# Altium PCB PCB2.PcbDoc
Units mil, origin at the board's own origin, x right, y up, seen from the top; angles counter-clockwise.
Board outline 3940.03 x 2530.03 mil, 2 copper layers (Top Layer, Bottom Layer); 24 components, 29 nets, 108 pads, 24 vias.
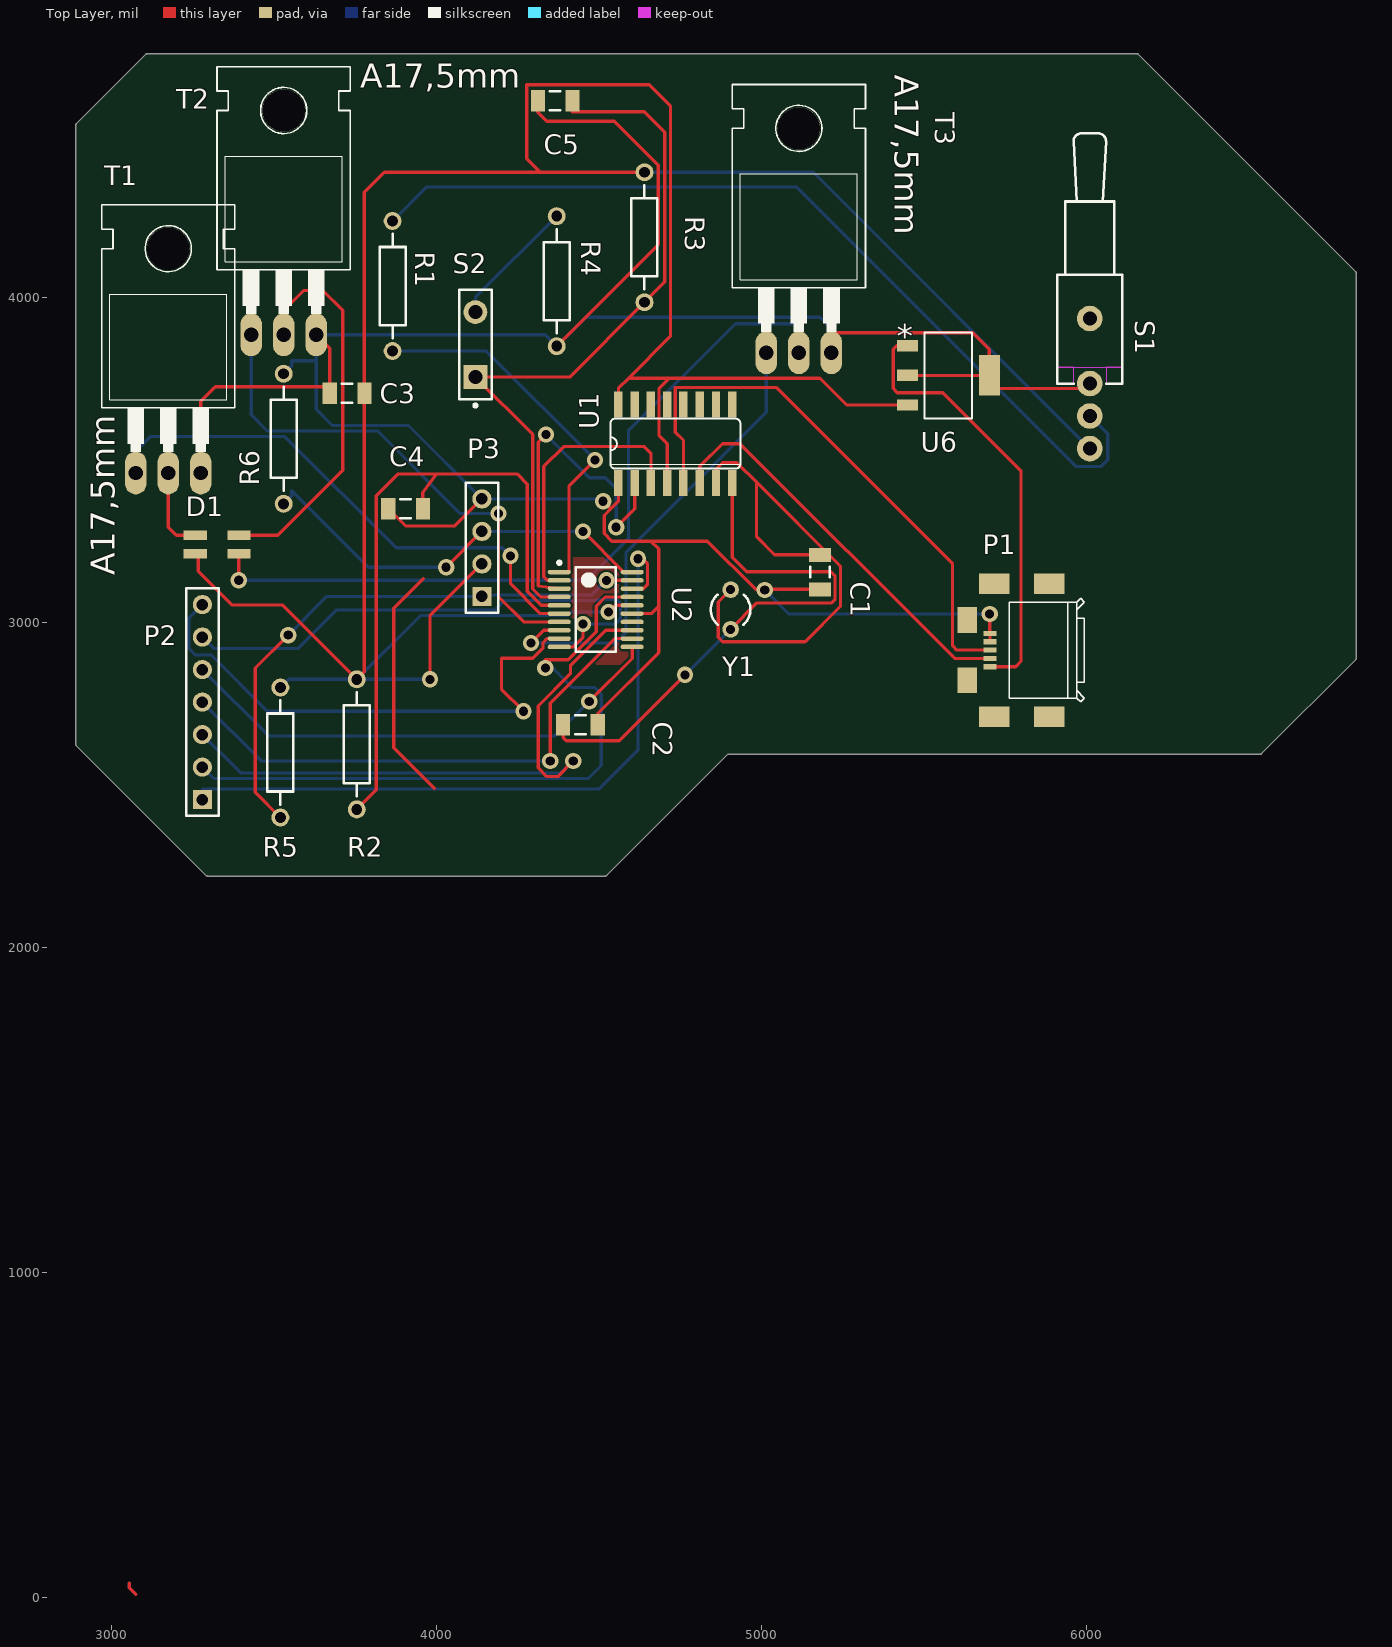
[diagram p0: Top Layer view]
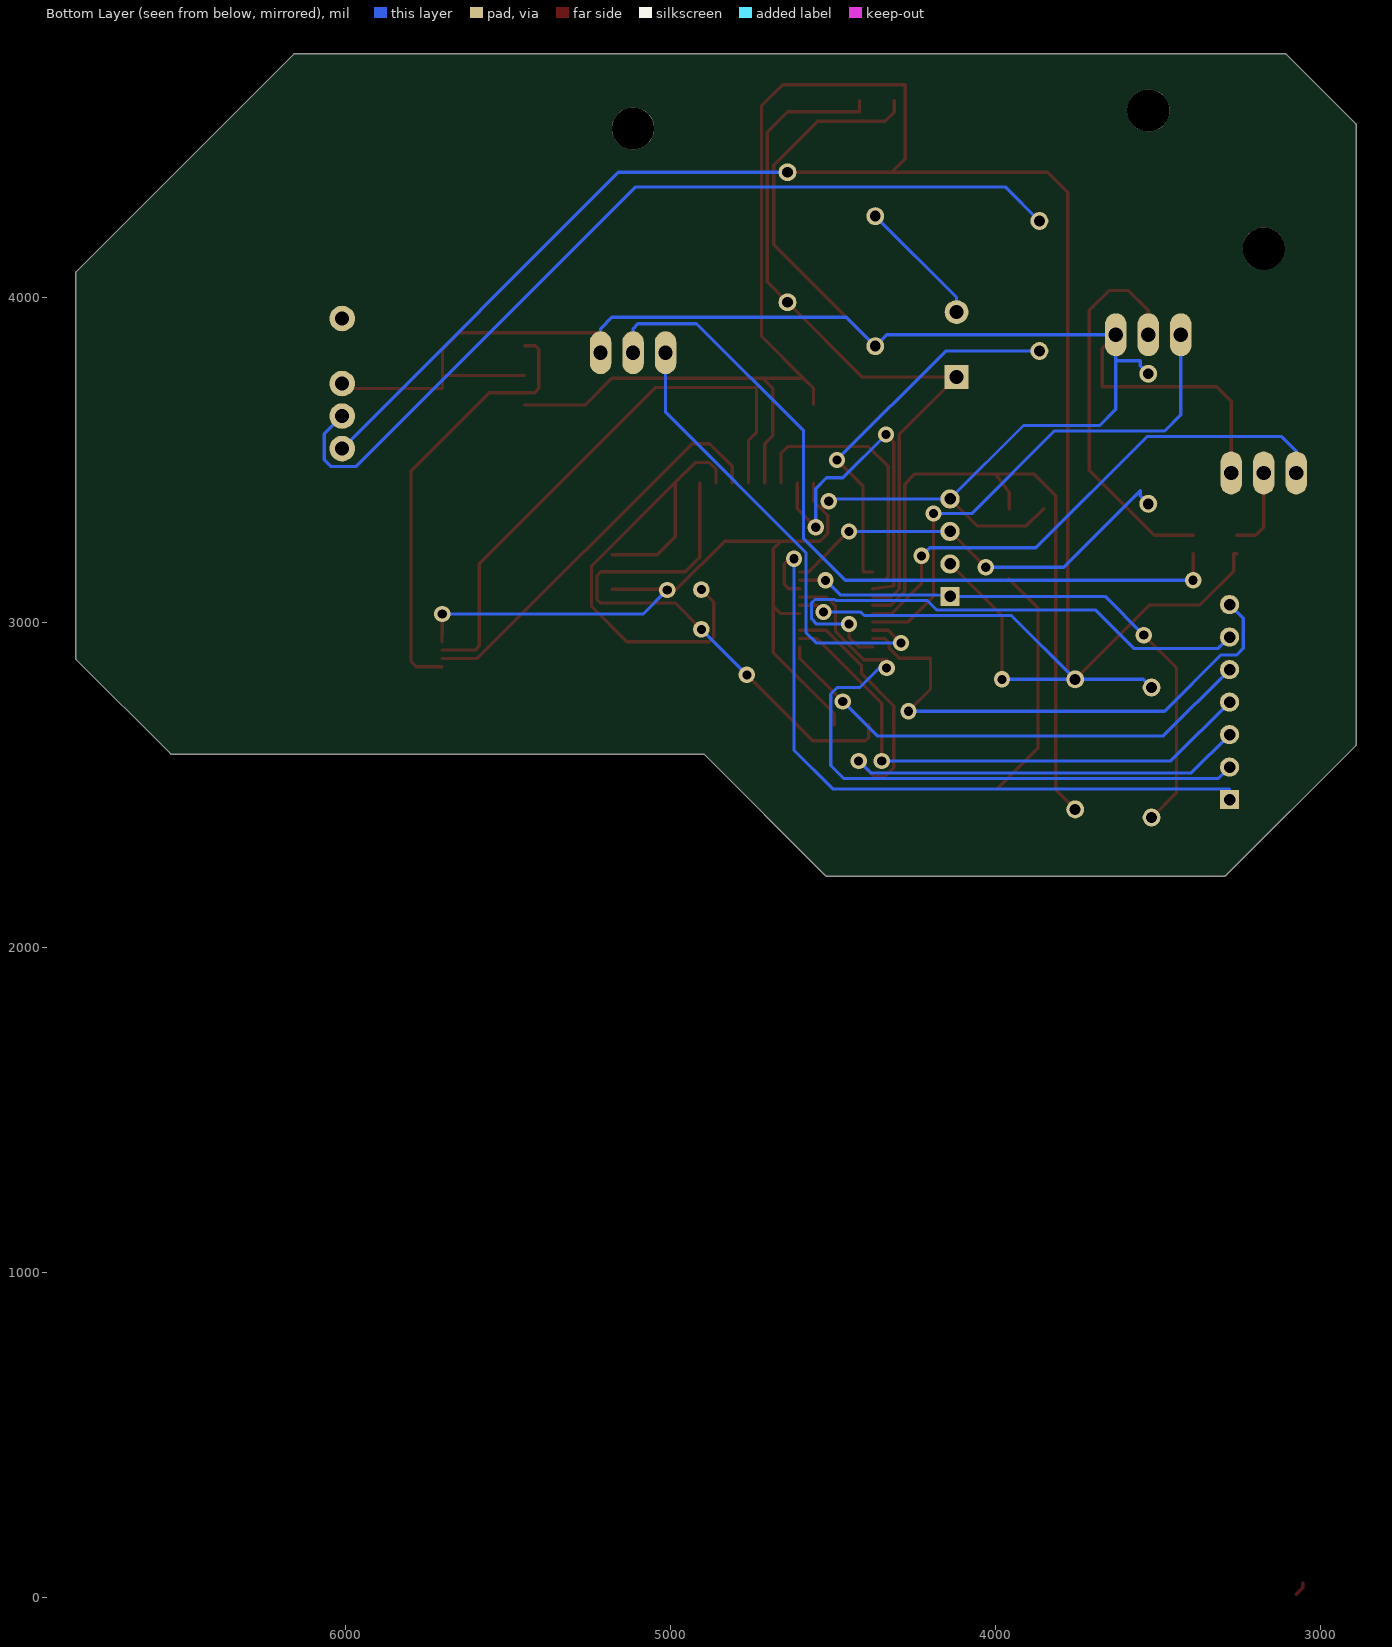
[diagram p1: Bottom Layer view, seen from below]

## Layer stack, top to bottom
Top Solder: solder mask 0.4, Solder Resist, Dk 3.5
Top Layer: signal copper 1.4
Dielectric 1: dielectric 12.6, FR-4, Dk 4.8
Bottom Layer: signal copper 1.4
Bottom Solder: solder mask 0.4, Solder Resist, Dk 3.5

## Board outline
2891.45,2621.45 3291.45,2221.45 3291.44,2221.47 ccw(c3295,2225) 3295,2219.99 4520,2219.99 ccw(c4520,2225) 4523.56,2221.47 4523.55,2221.45 4897.08,2594.99 6535,2594.99 ccw(c6535,2600) 6538.56,2596.47 6538.55,2596.45 6828.55,2886.45 6828.53,2886.44 ccw(c6825,2890) 6830.02,2890 6830.02,4075 ccw(c6825,4075) 6828.53,4078.56 6828.55,4078.55 6158.55,4748.55 6158.56,4748.53 ccw(c6155,4745) 6155,4750.02 3110,4750.02 ccw(c3110,4745) 3106.44,4748.53 3106.45,4748.55 2891.45,4533.55 2891.47,4533.56 ccw(c2895,4530) 2889.99,4530 2889.99,2625 ccw(c2895,2625)

## Design rules (kind name [scope] priority, off if disabled: settings)
Clearance [All] p1: gap=7 ignorepadtopadclearanceinfootprint=FALSE
PolygonConnect [All] p1: connectstyle=Relief reliefconductorwidth=10 reliefentries=4 polygonreliefangle="90 Angle" airgapwidth=10
RoutingVias [All] p1: holewidth=28 width=50 viastyle="Through Hole" minholewidth=28 minwidth=50 maxholewidth=28 maxwidth=50
SolderMaskExpansion [All] p1: expansion=4
Width [All] p1: maxlimit=10 minlimit=10 preferedwidth=10
30 further rules are at their usual default settings.

## Components (designator, comment, footprint, x,y, rotation, side; value= is the part's Value field where it differs from the comment)
C1 "Cap Semi" C1206 5180,3155 r90 top value=22pF
C2 "Cap Semi" C1206 4443.15,2685 r180 top value=22pF
C3 "Cap Semi" C1206 3725,3705 r0 top value=100pF
C4 "Cap Semi" C1206 3905,3350 r0 top value=100pF
C5 "Cap Semi" C1206 4365,4605 r0 top value=100pF
D1 "smd3528" PLCC4 3325,3240 r0 top
P1 "ZX62M-B-5P(01)" HRS_ZX62M-B-5P(01) 5835,2915 r90 top
P2 "Header 7" HDR1X7 3280,2455 r90 top
P3 "Header 4" HDR1X4 4140,3080 r90 top
R1 "Res2" AXIAL-0.4 3865,4035 r90 top value=1K
R2 "Res2" AXIAL-0.4 3755,2625 r90 top value=1K
R3 "Res2" AXIAL-0.4 4640,4185 r90 top value=10K
R4 "Res2" AXIAL-0.4 4370,4050 r90 top value=100
R5 "Res2" AXIAL-0.4 3520,2600 r90 top value=10K
R6 "Res2" AXIAL-0.4 3530,3565 r90 top value=10K
S1 "SW-SPDT" TL36WW15050 6010,3735 r90 top
S2 "SW-PB" SPST-2 4120,3855 r90 top
T1 "IRF530" TO220 3175,3710 r0 top
T2 "IRF530" TO220 3530,4135 r0 top
T3 "IRF530" TO220 5115,4080 r0 top
U1 "CH340" SO16 4735,3550 r0 top
U2 "STM32F030F4P6" STM-TSSOP20_N 4490,3040 r0 top
U6 "LM2937IMP-12" SOT230P700X180-4N 5575,3760 r0 top
Y1 "12MHZ" R38 4905,3040 r0 top

## Footprints (in the part's own frame and the unit in brackets; to place one, negate y for a bottom-side part, rotate by r counter-clockwise, add the part's x,y. Pads: shape width x height; smd on the part's side, far side on the other; paste and mask are expansions set on the pad)
AXIAL-0.4 [mm] "Axial Device, Thru-Hole; 2 Leads; 0.4 in Pin Spacing"
  round 1.4 hole 0.85: 1(-5.08,0) 2(5.08,0)
  silkscreen extent -4.06,-1.02 4.06,1.02
C1206 [mm] "Chip Capacitor, Body 3.2x1.6mm, IPC High Density"
  rect 1.1x1.7 smd: 1(-1.35,0) 2(1.35,0)
  silkscreen extent -0.4,-0.75 0.4,0.75, body extent -1.7,-0.9 1.7,0.9, height 1.3
HDR1X4 [mm] "Connector; Header; 4 Position"
  rect 1.5x1.5 hole 0.9: 1(0,0)
  round 1.5 hole 0.9: 2(2.54,0) 3(5.08,0) 4(7.62,0)
  silkscreen extent -1.27,-1.27 8.89,1.27
HDR1X7 [mm] "Connector; Header; 7 Position"
  rect 1.5x1.5 hole 0.9: 1(0,0)
  round 1.5 hole 0.9: 2(2.54,0) 3(5.08,0) 4(7.62,0) 5(10.16,0) 6(12.7,0) 7(15.24,0)
  silkscreen extent -1.27,-1.27 16.51,1.27
HRS_ZX62M-B-5P(01) [mm]
  rect 0.4x1.05 smd: 1(-1.3,3.355) 2(-0.65,3.355) 3(0,3.355) 4(0.65,3.355) 5(1.3,3.355)
  rect 1.6x2.4 smd: S1(5.2,-1.27) S2(-5.2,-1.27) S3(-5.2,3.03) S6(5.2,3.03)
  rect 2x1.5 smd: S4(-2.35,5.13) S5(2.35,5.13)
  silkscreen extent -4.05,-4.02 4.05,1.83
PLCC4 [mm]
  rect 1.8x0.75 smd: 1(1.7,-0.725) 2(-1.7,-0.725) 3(-1.7,0.725) 4(1.7,0.725)
R38 [mm] "Crystal, Thru-Hole; 2 Leads; Body 3.1 x 8.2 mm (Dia.xH)"
  round 1.3 hole 0.7: 1(0,1.55) 2(0,-1.55)
  silkscreen extent -1.55,-1.19 1.55,1.17
SO16 [mil]
  rect 26x80 smd: 1(-175,-121) 2(-125,-121) 3(-75,-121) 4(-25,-121) 5(25,-121) 6(75,-121) 7(125,-121) 8(175,-121) 9(175,121) 10(125,121) 11(75,121) 12(25,121) 13(-25,121) 14(-75,121) 15(-125,121) 16(-175,121)
  silkscreen extent -200,-77 200,77
SOT230P700X180-4N [mil]
  rect 64x35 smd: 1(-126,91) 2(-126,0) 3(-126,-91)
  rect 64x125 smd: 4(126,0)
  silkscreen extent -73,-132 73,132
SPST-2 [mm] "Switch; 2 Leads"
  rect 1.85x1.85 hole 1.1: 1(-2.54,0)
  round 1.85 hole 1.1: 2(2.54,0)
  silkscreen extent -4.89,-1.27 4.28,1.27
STM-TSSOP20_N [mm] "SOP, 20-Leads, Body 6.6x4.5mm, Pitch 0.65mm, IPC Medium Density"
  oval 1.8x0.35 smd: 1(-2.85,2.925) 2(-2.85,2.275) 3(-2.85,1.625) 4(-2.85,0.975) 5(-2.85,0.325) 6(-2.85,-0.325) 7(-2.85,-0.975) 8(-2.85,-1.625) 9(-2.85,-2.275) 10(-2.85,-2.925) 11(2.85,-2.925) 12(2.85,-2.275) 13(2.85,-1.625) 14(2.85,-0.975) 15(2.85,-0.325) 16(2.85,0.325) 17(2.85,0.975) 18(2.85,1.625) 19(2.85,2.275) 20(2.85,2.925)
  silkscreen extent -2.97,-3.3 1.55,3.77, body extent -2.25,-3.3 2.25,3.3, height 1.2
TL36WW15050 [mm] "Switch; 4 Leads"
  round 2 hole 1.1: 1(0,0) 2(-2.54,0) 3(-5.08,0) M(5.08,0)
  Top Layer keep-out region: 0,-1.27 0,-2.54 1.27,-2.54 1.27,-1.27
  Top Layer keep-out region: 0,2.54 0,1.27 1.27,1.27 1.27,2.54
  Top Layer keep-out region: 1.27,2.54 1.27,-2.54 8.509,-2.54 8.509,2.54
  silkscreen extent 0,-2.54 19.56,2.54
TO220 [mil]
  oval 66x132 hole 44: 1(-100,-250) 2(0,-250) 3(100,-250)
  round 130 hole 130 unplated: None(0,440)
  silkscreen extent -205,-185 205,575

## Part data
C1 C2 C3 C4 C5: "Capacitor (Semiconductor SIM Model)", LatestRevisionDate=29-May-2009, LatestRevisionNote="IPC-7351 Footprint Added.", PackageDescription="Chip Capacitor", PackageReference=C1206, Published=8-Jun-2000, Publisher="Altium Limited"
D1: library part 67-23SDRSUGSUBC/TR8, "SMD-LED RGB 112/216/57mcd PLCC", Package=None, Availability=Warning, MF=Everlight, MP=67-23SDRSUGSUBC/TR8, Price=None
P1: "Conn Micro USB 2.0 Type B RCP 5 POS 0.65mm Solder RA SMD 5 Terminal 1 Port T/R", Package=None, Availability=Unavailable, MF=Hirose, MP=ZX62M-B-5P(01), Price=None
P2: "Header, 7-Pin", LatestRevisionDate=17-Jul-2002, LatestRevisionNote="Re-released for DXP Platform.", Publisher="Altium Limited"
P3: "Header, 4-Pin", LatestRevisionDate=17-Jul-2002, LatestRevisionNote="Re-released for DXP Platform.", Publisher="Altium Limited"
R1 R2 R3 R4 R5 R6: "Resistor", LatestRevisionDate=17-Jul-2002, LatestRevisionNote="Re-released for DXP Platform.", PackageDescription="Axial Device, Thru-Hole; 2 Leads; 0.4 in Pin Spacing", PackageReference=AXIAL-0.4, Published=8-Jun-2000, Publisher="Altium Limited"
S1: "SPDT Subminiature Toggle Switch, Right Angle Mounting, Vertical Actuation", ComponentLink1Description="Manufacturer Link", ComponentLink1URL=http://www.apem.com, DatasheetVersion=05-Dec-2000, LatestRevisionDate=17-Dec-2003, LatestRevisionNote="Schematic revised, PCB Footprint replaced.", PackageDescription="Switch; 4 Leads", PackageReference=TL36WW15050, Published=24-Mar-1999, Publisher="Altium Limited"
S2: "Switch", LatestRevisionDate=17-Jul-2002, LatestRevisionNote="Re-released for DXP Platform.", PackageDescription="Switch; 2 Leads", PackageReference=SPST-2, Published=24-Mar-1999, Publisher="Altium Limited"
T1 T2 T3: library part IRF840, "Trans MOSFET N-CH 500V 8A 3-Pin(3+Tab) TO-220AB", Package="TO-220 Vishay", Availability=Bad, MF=Vishay, MP=IRF840, Price="3.90 USD"
U1: "Eaton / Cutler Hammer CH340 Circuit Breaker 40 Amp 240 Volt AC 3-Pole Plug-On Mount", Package=None, Availability=Bad, MF="Eaton / Cutler Hammer", MP=CH340, Price="248.29 USD"
U2: "ARM Cortex-M0 32-bit MCU, 16 KB Flash, 4 KB Internal RAM, 15 I/Os, 20-pin TSSOP, -40 to 85 degC, Tube", I/Os (High Current)=15, Operating Frequency(F) (Processor speed) (MHz)=48, Supplier Part Number 1=497-14044-5-ND, Supply Voltage(Vcc) min (V)=2.4, ComponentLink1Description="Manufacturer URL", ComponentLink1URL=http://www.st.com/web/en/home.html, ComponentLink2Description=Datasheet, ComponentLink2URL=http://www.st.com/st-web-ui/static/active/en/resource/technical/document/datasheet/DM00088500.pdf, ComponentLink3Description="Package Specification", ComponentLink3URL=http://www.st.com/st-web-ui/static/active/en/resource/technical/document/datasheet/DM00065136.pdf, Core="ARM Cortex-M0", DatasheetVersion="Rev. 1", FLASH Size (Prog) (kB)=16, Internal RAM Size (kB)=4, Mounting Technology="Surface Mount", PackageDescription="20-Pin Thin Shrink Small Outline Package, 6.5 x 4.4 mm Body, 0.65 mm Pitch", PackageReference=TSSOP20, PackageVersion="Rev. 1, 11/2012", Packing=Tube, PartNumber=STM32F030F4P6, Supplier 1=Digi-Key, Supplier 2=Newark, Supplier 3=Mouser, Supplier Part Number 2=06X3648, Supplier Part Number 3=511-STM32F030F4P6
U6: "Sot-223", Package="SOT-223 Fairchild Semiconductor", Availability=Unavailable, MF="Fairchild Semiconductor", MP=LM2937IMP-12, Price=None
Y1: library part XTAL, "Crystal Oscillator", LatestRevisionDate=17-Jul-2002, LatestRevisionNote="Re-released for DXP Platform.", PackageDescription="Crystal, Thru-Hole; 2 Leads; Body 3.1 x 8.2 mm (Dia.xH)", PackageReference=R38, Published=8-Jun-2000, Publisher="Altium Limited"

## Via types
v1: diameter 50, hole 28, Top Layer to Bottom Layer, 24 vias

## Nets (pads, with @x,y where several pads share a name; then routed paths per layer and width w, separated by ;. In a path a pad name is that pad's centre, name@x,y a point inside that pad or via, vN(x,y) a via of type N, cw(c..) or ccw(c..) an arc to the next point about the centre after c; other vN are vias at no path point)
Bled: T1.1 U2.6 | length 1664.4
  Top Layer w10: v1(4228,3205) 4228,3119.2 4320,3027.2 U2.6
  Bottom Layer w10: T1.1 3075,3527 3120,3572 3534,3572 3876,3230 4203,3230 v1(4228,3205)
Gled: T2.1 U2.7 | length 1607.8
  Top Layer w10: v1(4191,3335) 4191,3078.91 4268.29,3001.61 U2.7
  Bottom Layer w10: T2.1 3430,3639 3480,3589 3819,3589 4073,3335 v1(4191,3335)
GND: C1.1 C2.1 C3.1 C4.1 C5.1 P1.4 P1.5 P3.4 R4.1 R6.2 S1.1 T1.3 T2.3 T3.3 U1.1 U2.15 U6.2 U6.4 | length 9147.8
  Top Layer w10: T1.3 3275,3680 3320,3725 3671.85,3725 3671.85,3843.15 T2.3 ; C4.1 3904.85,3297 4057,3297 P3.4 ; C5.1 4311.85,4570.15 4340,4542 4547,4542 4682.56,4406.44 4682.56,4162.56 R4.1 ; C2.1 4496.3,2720 4683.64,2907.34 4683.64,3049.43 ; v1(4513,3373) 4536.5,3349.5 ; U1.1 4560,3373 4536.5,3349.5 ; U2.15 4661.42,3027.2 4683.64,3049.43 ; v1(5010,3100) v1@5011.85,3101.85 ; C1.1 v1@5011.85,3101.85 ; T3.3 5215,3891 5650,3891 5701,3840 U6.4 ; U6.2 U6.4 ; v1(5702,3026) 5702,2966.18 P1.5 P1.4 ; S1.1 5995,3720 5701,3720 U6.4 ; 4536.5,3349.5 4516,3329 4516,3274 4540,3250 4660,3250 ; 4660,3250 4683.64,3226.36 4683.64,3049.43 ; 4660,3250 4833.7,3250 4981.85,3101.85 v1@5011.85,3101.85
  Bottom Layer w10: R6.2 3555,3790 3555,3805 3630,3805 ; v1(4513,3373) 4506,3380 P3.4 3914,3606 3680,3606 3630,3656 3630,3805 ; v1(5010,3100) 5084,3026 v1(5702,3026) ; T3.3 5215,3904 5180,3939 4459,3939 R4.1 4335,3885 T2.3 3630,3805
IN: U1.3 U2.2 | length 846.9
  Top Layer w10: U2.2 4340.79,3129.57 4330.36,3140 4330.36,3480 4391.36,3541 4640,3541 4660,3521 U1.3
NetC1_2: C1.2 U1.7 Y1.1 | length 1664.3
  Top Layer w10: U1.7 4860,3472 4880,3492 4924,3492 4985,3431 ; Y1.1 4867,3063.02 4867,2954 4880,2941 5134,2941 5243,3050 5243,3173 4985,3431 ; C1.2 5040,3208.15 4985,3263.15 4985,3431
NetC2_2: C2.2 U1.8 Y1.2 | length 1701
  Top Layer w10: C2.2 4390,2646 4400,2636 4561.98,2636 v1(4764.98,2839) ; Y1.2 4986.02,3060 5216,3060 5226,3070 5226,3143.89 5213.89,3156 4954,3156 4910,3200 U1.8
  Bottom Layer w10: v1(4764.98,2839) Y1.2
NetD1_1: D1.1 T3.2 | length 2406
  Top Layer w10: D1.1 3392,3211.46 v1(3392,3130)
  Bottom Layer w10: v1(3392,3130) 4462.87,3130 4590.5,3257.63 4590.5,3589.5 4920,3919 5100,3919 5115,3904 T3.2
NetD1_3: D1.3 T1.2 | length 259.9
  Top Layer w10: T1.2 3175,3293.54 3200,3268.54 D1.3
NetD1_4: D1.4 T2.2 | length 1201.9
  Top Layer w10: D1.4 3512,3268.54 3712,3468.54 3712,3960 3651,4021 3591,4021 3530,3960 T2.2
NetP1_1: P1.1 U6.1 | length 1355.1
  Top Layer w10: U6.1 5416,3851 5405,3840 5405,3720 5418,3707 5558,3707 5798,3467 5798,2880 5781.82,2863.82 P1.1
NetP1_2: P1.2 U1.6 | length 1246.5
  Top Layer w10: U1.6 4810,3480 4880,3550 4933.42,3550 5594.01,2889.41 P1.2
NetP1_3: P1.3 U1.5 | length 1754.6
  Top Layer w10: U1.5 4760,3560 4735,3585 4735,3723 5045,3723 5588,3180 5588,2928 5601,2915 P1.3
NetP2_1: P2.1 U2.18 | length 2163
  Top Layer w10: U2.18 4636,3103.98 4649.64,3117.62 4649.64,3180 4633.64,3196 v1(4620,3196)
  Bottom Layer w10: P2.1 3280,2488 4501,2488 4620,2607 v1(4620,3196)
NetP2_2: P2.2 U2.17 | length 2101.5
  Top Layer w10: v1(4335,2860) 4335,2885 4405.04,2885 4492,2971.96 4492,3050.39 4520,3078.39 U2.17
  Bottom Layer w10: P2.2 3315,2520 4467,2520 4507,2560 4507,2780 4487,2800 4417.96,2800 4357.96,2860 v1(4335,2860)
NetP2_3: P2.3 U2.13 | length 1934.7
  Top Layer w10: v1(4421,2574) 4373,2526 4340,2526 4313,2553 4313,2743 4412.07,2842.07 4412.07,2867.1 4521,2976.02 U2.13
  Bottom Layer w10: P2.3 3398,2537 4384,2537 v1(4421,2574)
NetP2_4: P2.4 U2.12 | length 1657
  Top Layer w10: v1(4350,2574) 4350,2751.43 4549,2950.43 U2.12
  Bottom Layer w10: P2.4 3461,2574 v1(4350,2574)
NetP2_5: P2.5 U2.11 | length 1541
  Top Layer w10: v1(4470,2757) 4602.2,2889.2 U2.11
  Bottom Layer w10: P2.5 3484,2651 4364,2651 v1(4470,2757)
NetP2_6: P2.6 U2.10 | length 1663.6
  Top Layer w10: U2.10 4420.84,2924.84 4451,2955 v1(4451,2995)
  Bottom Layer w10: P2.6 3315,2920 3575,2920 3693.47,3038.47 4181.53,3038.47 4210.78,3067.72 4492.13,3067.72 4495,3070.59 4555.41,3070.59 4566,3060 4566,3011 4550,2995 v1(4451,2995)
NetP2_7: P2.7 U2.9 | length 1666.1
  Top Layer w10: v1(4268,2727) 4200,2795 4200,2890 4296.3,2890 4327.99,2921.69 4327.99,2938.42 4340,2950.43 U2.9
  Bottom Layer w10: P2.7 3238,3013 3238,2920 3258,2900 3307,2900 3480,2727 v1(4268,2727)
NetR1_1: R1.1 U2.1 | length 1169.9
  Top Layer w10: U2.1 4408,3155.16 4408,3420 v1(4488,3500)
  Bottom Layer w10: R1.1 4153,3835 v1(4488,3500)
NetR1_2: R1.2 S1.2 | length 2765.8
  Bottom Layer w10: R1.2 3970,4340 5107,4340 5967,3480 6045,3480 6065,3500 6065,3580 S1.2
NetR4_2: R4.2 S2.2 | length 398.6
  Bottom Layer w10: S2.2 4120,4000 R4.2
OUT: U1.2 U2.3 | length 1104.1
  Top Layer w10: v1(4337,3578) 4313.36,3554.36 4313.36,3112 U2.3 ; v1(4553,3293) 4610,3350 U1.2
  Bottom Layer w10: v1(4337,3578) 4470,3445 4520,3445 4553,3412 v1(4553,3293)
Rled: T3.1 U2.8 | length 1448.8
  Top Layer w10: v1(4290.99,2937.01) 4330,2976.02 U2.8
  Bottom Layer w10: v1(4290.99,2937.01) 4552.01,2937.01 4583,2968 4583,3214.22 5015,3646.22 T3.1
RST: C5.2 R3.1 S2.1 U2.4 | length 2325.6
  Top Layer w10: U2.4 4320.97,3078.39 4296.36,3103 4296.36,3578.64 S2.1 4410,3755 R3.1 4702.56,4047.56 4702.56,4508.44 4640,4571 4418.15,4571 C5.2
swdclk: P3.3 R6.1 U2.20 | length 1292.2
  Top Layer w10: v1(4030,3170) P3.3 ; v1(4451.16,3280) 4576,3155.16 U2.20
  Bottom Layer w10: R6.1 3555,3390 3555,3405 3790,3170 v1(4030,3170) ; P3.3 v1(4451.16,3280)
swdi: P3.1 R5.1 U2.19 | length 1761.1
  Top Layer w10: R5.1 3443,2477 3443,2860 v1(3544,2961) ; v1(4522.84,3129.57) U2.19
  Bottom Layer w10: v1(3544,2961) 3663,3080 P3.1 4179.72,3084.72 4478,3084.72 v1(4522.84,3129.57)
VCC: C3.2 D1.2 P3.2 R2.2 R3.2 R5.2 S1.3 U1.4 U1.16 U2.16 U6.3 | length 9615.6
  Top Layer w10: D1.2 3267,3211.46 3267,3158 3371,3054 3526,3054 R2.2 3778.15,2848.15 C3.2 3778.15,4323.15 3840,4385 4320,4385 ; v1(3980,2825) 3980,3020 P3.2 ; v1(4529,3032) 4549.8,3052.8 U2.16 ; U1.16 4560,3720 4591,3751 ; R3.2 4320,4385 ; U1.4 4710,3550 4685,3575 4685,3720 4716,3751 ; U6.3 5262,3669 5180,3751 4716,3751 ; 4320,4385 4278,4427 4278,4654 4655,4654 4720,4589 4720,3880 4591,3751 ; 4591,3751 4716,3751
  Bottom Layer w10: R5.2 3545,2825 R2.2 ; v1(3980,2825) R2.2 ; v1(4529,3032) 4414,3032 4403.47,3021.47 3951.47,3021.47 R2.2 ; R3.2 5160,4385 S1.3
VDDA: C4.2 R2.1 U2.5 | length 2061.7
  Top Layer w10: R2.1 3815,2485 3815,3390 3882,3457 4000,3457 ; C4.2 3958.15,3400 4000,3457 ; U2.5 4322.47,3052.8 4279.36,3095.91 4279.36,3425.64 4248,3457 4000,3457
pads on no net: P1.S1 P1.S2 P1.S3 P1.S4 P1.S5 P1.S6 S1.M T1.None T2.None T3.None U1.9 U1.10 U1.11 U1.12 U1.13 U1.14 U1.15 U2.14
copper on no net: | length 777.3
  Top Layer w10: 3055,45 3055,30 3075,10 ; 3960,3135 3869.03,3044.03 3869.03,2613.97 3993,2490

## Polygon pours and split planes (outlines as drawn)
no net on Top Layer "Gnd" (solid, pour order 0): 4335,3200 4616,3200 4640,3176 4640,2870 4345,2870 4320,2895 4320,2965 4305,2980

## Silkscreen, mask and mechanical layers (free items; w line width, h text height)
Mechanical 1:
  lines w10: 4715,4745 6155,4745 6825,4075 6825,2890 6535,2600 4895,2600 4520,2225 3295,2225 2895,2625 2895,4530 3110,4745 4740,4745

## Text inside footprints (layer, text, board x,y; h text height)
T1: Top Overlay "A17,5mm" at 3010,3145 h73.82 r90; Mechanical 1 "1" at 3049.94,3700.16 h73.82; Mechanical 1 "2" at 3149.99,3700.16 h73.82; Mechanical 1 "3" at 3250.08,3700.16 h73.82
T2: Top Overlay "A17,5mm" at 3765,4645 h73.82; Mechanical 1 "1" at 3404.94,4125.16 h73.82; Mechanical 1 "2" at 3504.99,4125.16 h73.82; Mechanical 1 "3" at 3605.08,4125.16 h73.82
T3: Top Overlay "A17,5mm" at 5410,4685 h73.82 r270; Mechanical 1 "1" at 4989.94,4070.16 h73.82; Mechanical 1 "2" at 5089.99,4070.16 h73.82; Mechanical 1 "3" at 5190.08,4070.16 h73.82
U6: Top Overlay "*" at 5416.75,3844.31 h73.82; Mechanical 1 "*" at 5416.84,3844.25 h73.82